# Altium PCB Alimentation 2V.PcbDoc
Units mil, origin at the board's own origin, x right, y up, seen from the top; angles counter-clockwise.
Board outline 2000 x 2000 mil, 4 copper layers (Top Layer, MidLayer1, MidLayer2, Bottom Layer); 20 components, 10 nets, 43 pads, 21 vias.
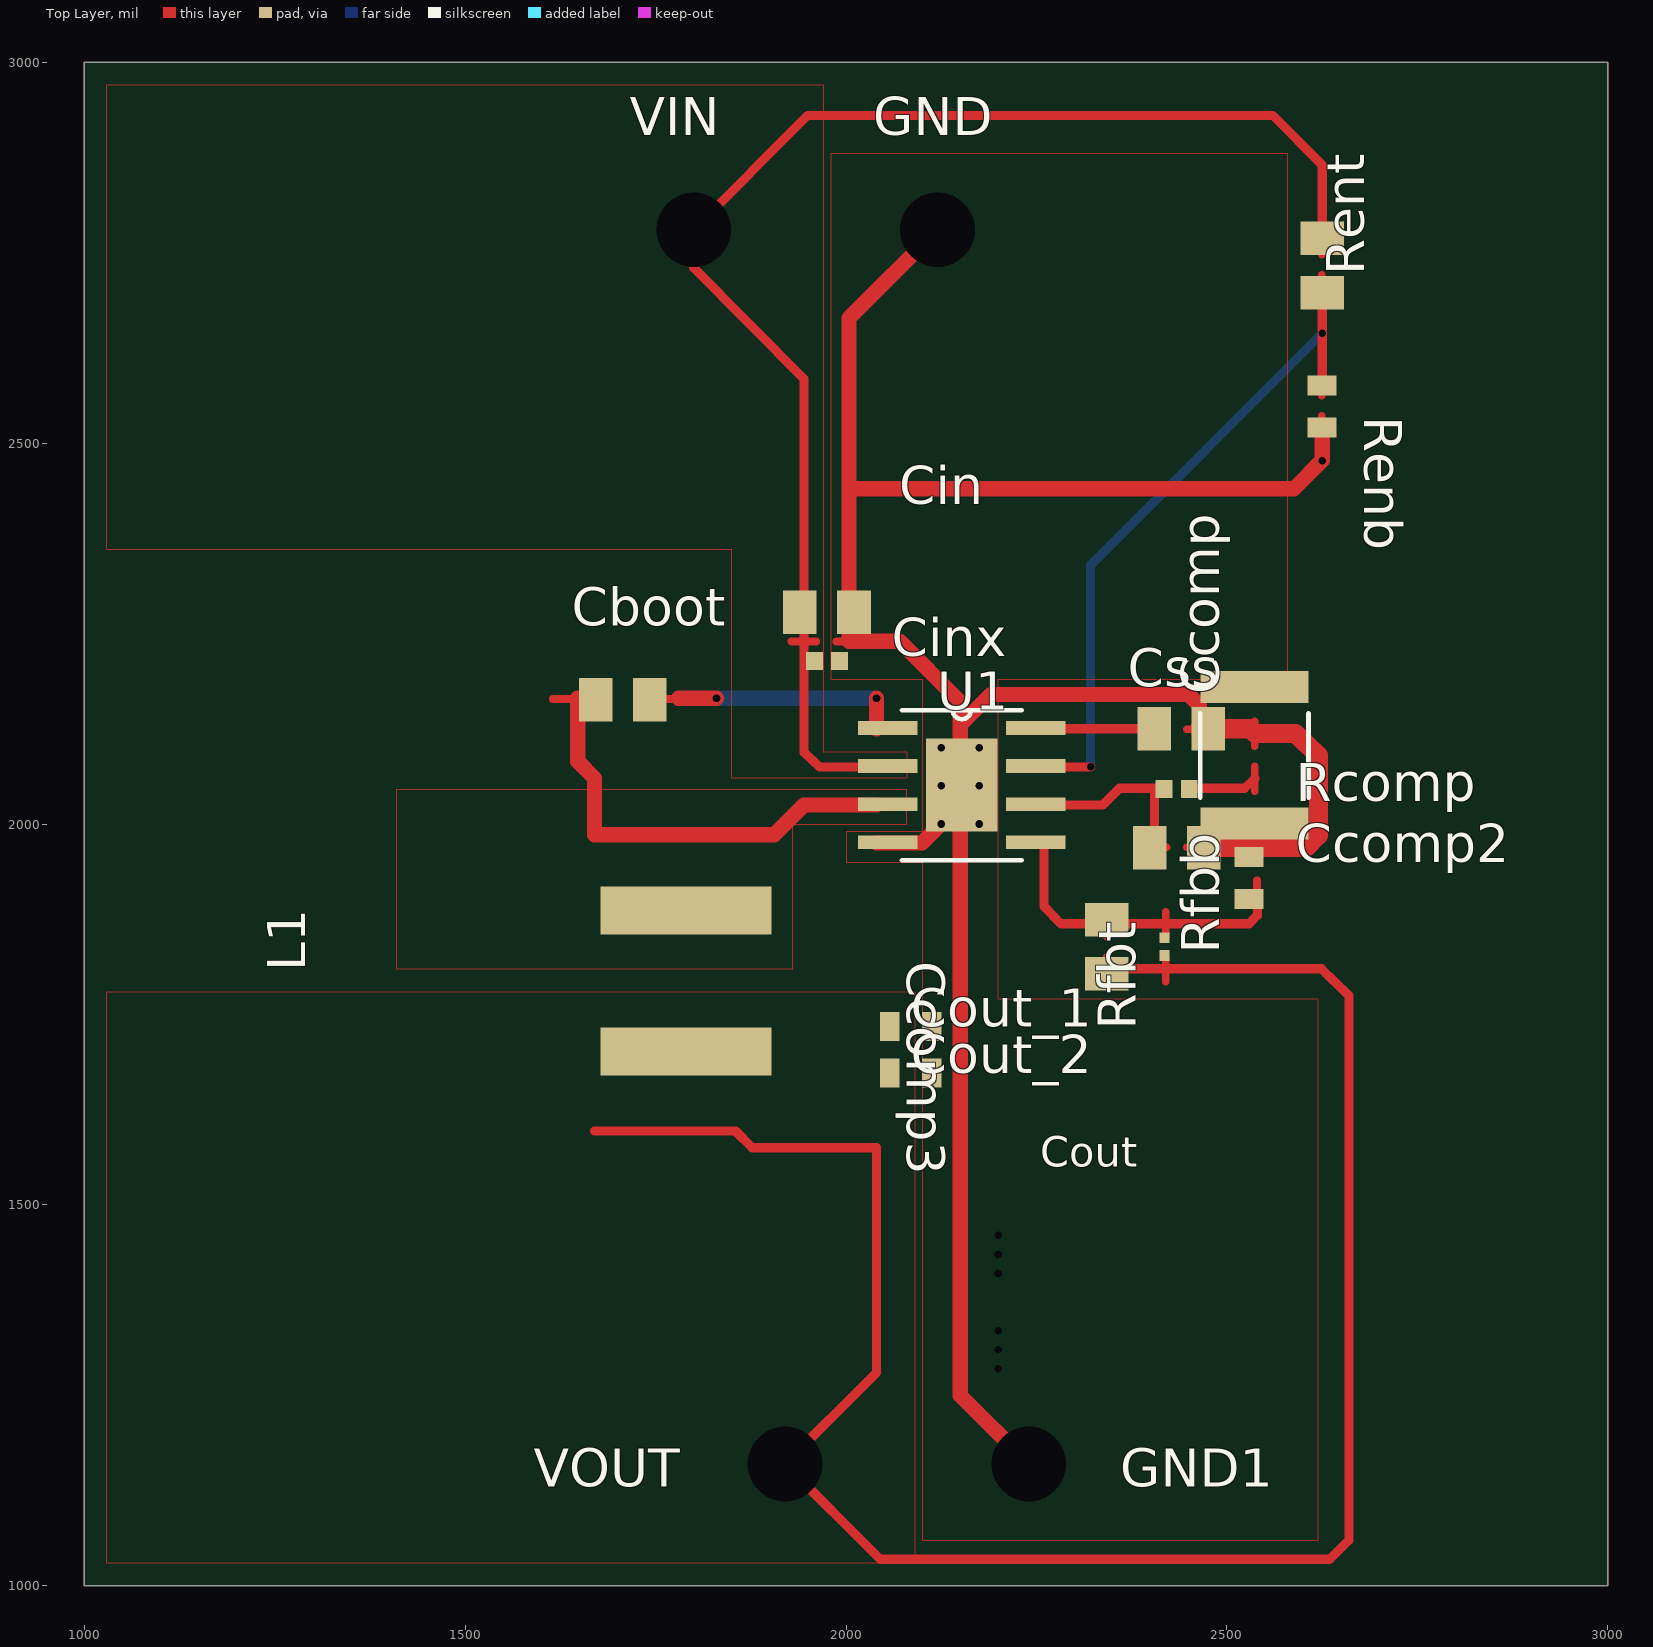
[diagram p0: Top Layer view]
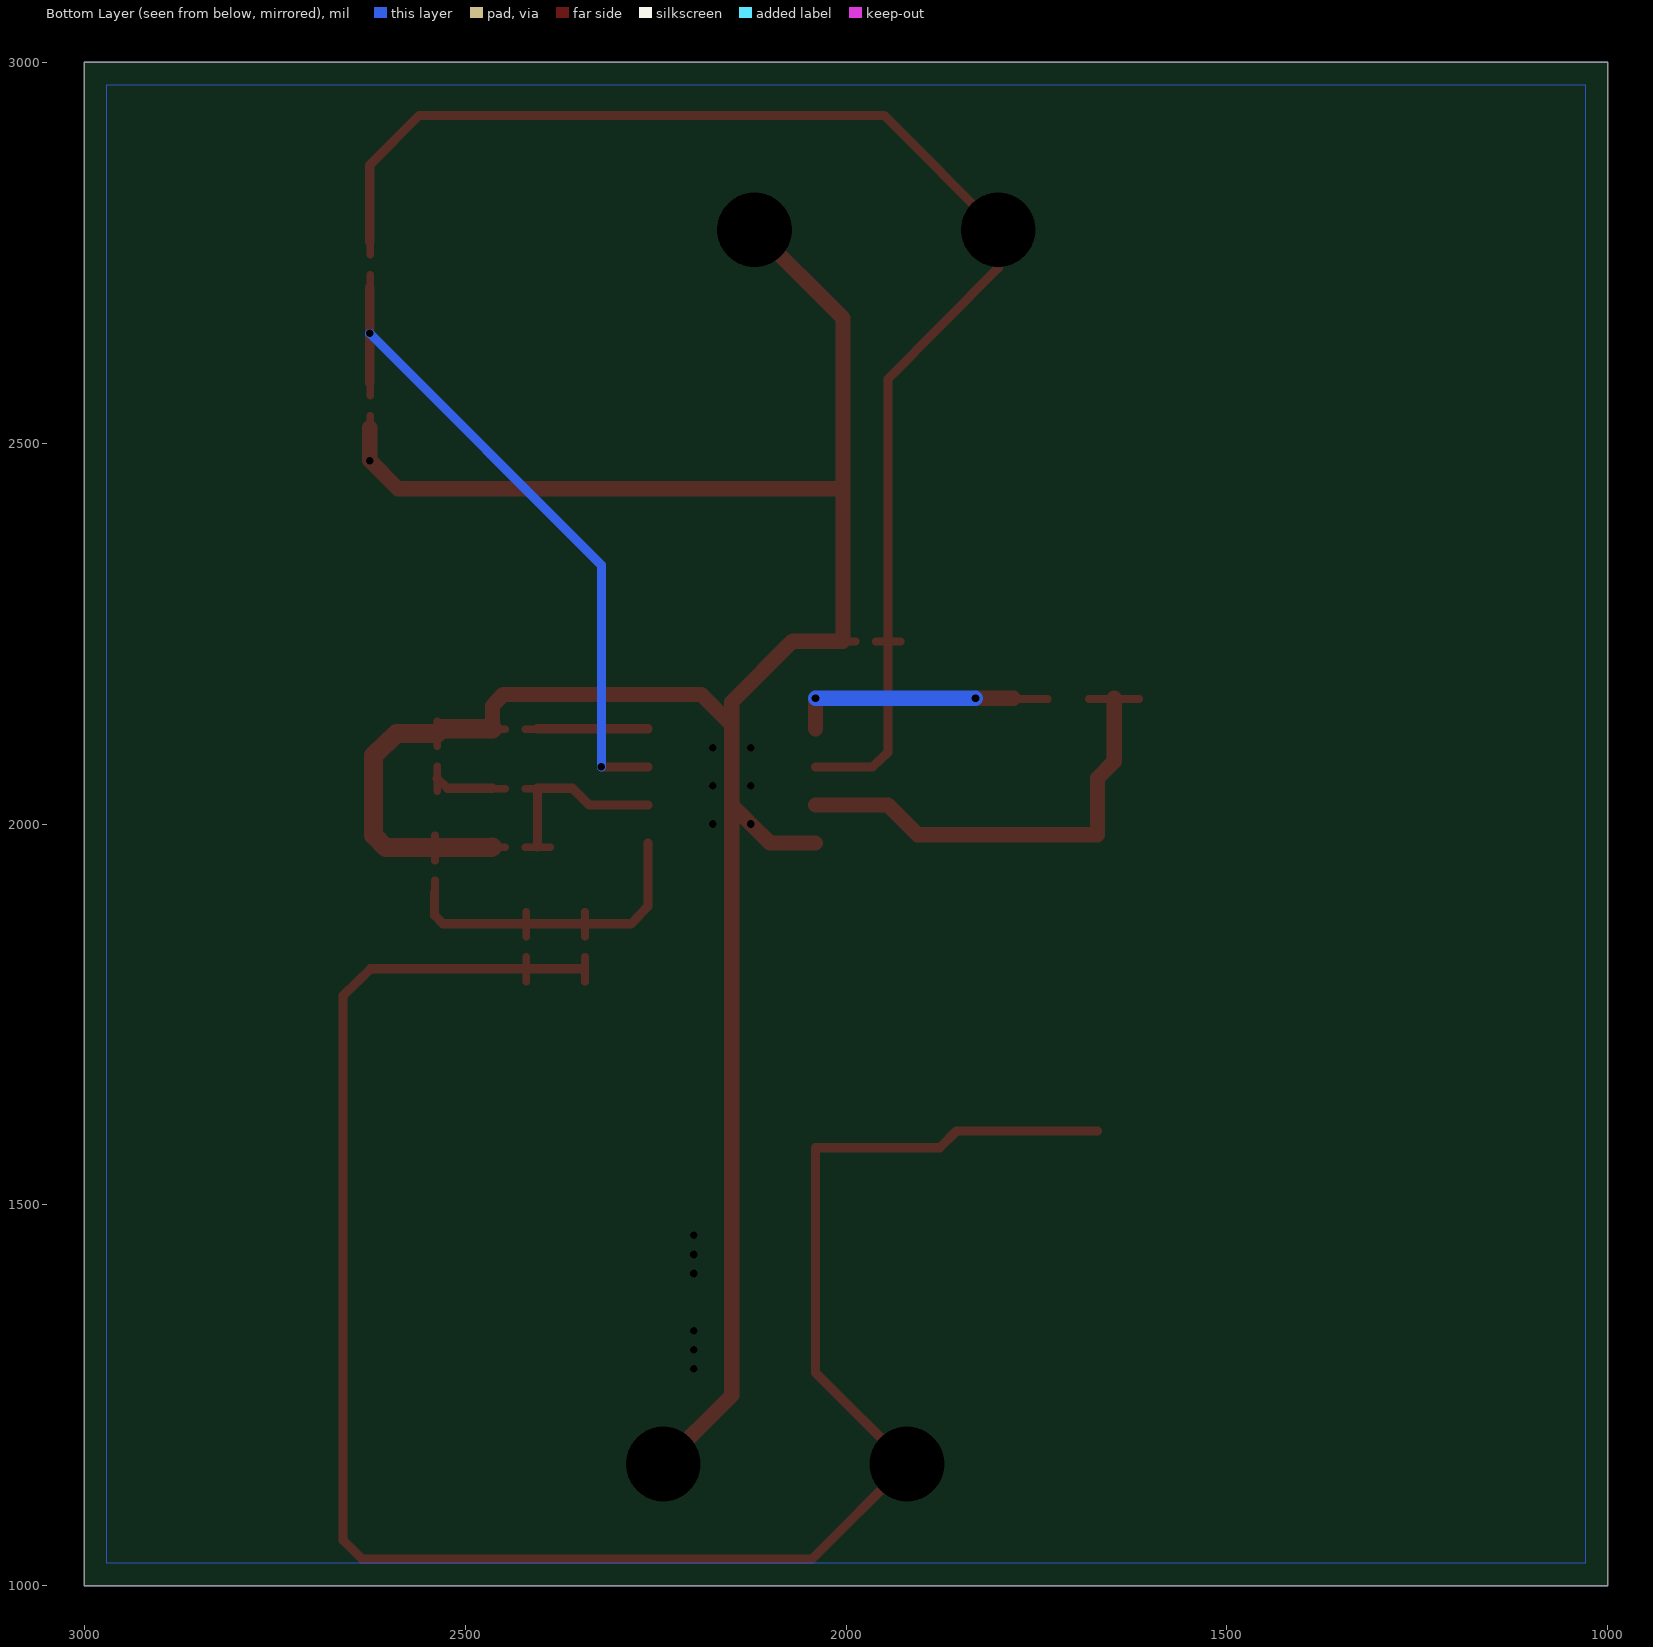
[diagram p1: Bottom Layer view, seen from below]

## Layer stack, top to bottom
Top Layer: signal copper 1.4
Dielectric: core 12.6, FR-4, Dk 4.8
MidLayer1: signal copper 1.4
Dielectric: prepreg 12.6, FR-4, Dk 4.8
MidLayer2: signal copper 1.4
Dielectric: core 12.6, FR-4, Dk 4.8
Bottom Layer: signal copper 1.4

## Board outline
1000,1000 3000,1000 3000,3000 1000,3000

## Design rules (kind name [scope] priority, off if disabled: settings)
PlaneConnect [All] p0: scope1count=1 scope1_0_kind=Board scope1_0_value=Board scope2count=1 scope2_0_kind=Board scope2_0_value=Board commentlength=0 planeconnectstyle=Direct reliefexpansion=20 reliefentries=4 reliefconductorwidth=10 reliefairgap=10
PlaneConnect [All] p1: planeconnectstyle=Direct reliefexpansion=20 reliefentries=4 reliefconductorwidth=10 reliefairgap=10
PolygonConnect [All] p0: scope1count=1 scope1_0_kind=Board scope1_0_value=Board scope2count=1 scope2_0_kind=Board scope2_0_value=Board commentlength=0 connectstyle=Direct reliefconductorwidth=10 reliefentries=4 polygonreliefangle="90 Angle"
PolygonConnect [All] p1: connectstyle=Direct reliefconductorwidth=10 reliefentries=4 polygonreliefangle="90 Angle"

## Components (designator, comment, footprint, x,y, rotation, side; value= is the part's Value field where it differs from the comment)
Cboot "" 0805 1707,2163 r0 top
Ccomp "" 1812 2536,2090 r90 top
Ccomp2 "" 0805 2434,1969 r0 top
Ccomp3 "" 0805 2342,1839 r270 top
Cin "" 0805 1975,2278 r0 top
Cinx "" 0402 1975,2214 r0 top
Cout_1 "" 0603 2085,1734 r0 top
Cout_2 "" 0603 2085,1673 r0 top
Css "" 0805 2440,2125 r0 top
GND "" TP-1502 2119,2779 r0 top
GND1 "" TP-1502 2239,1159 r0 top
L1 "" DG6045C 1790,1794 r90 top
Rcomp "" 0402 2434,2046 r0 top
Renb "" 0603 2625,2548 r270 top
Rent "" 0805 2625,2733 r90 top
Rfbb "" 0603 2529,1929 r90 top
Rfbt "" 0201 2418,1839 r90 top
U1 "" R-PDSO-G8 2152,2051 r0 top
VIN "" TP-1502 1798,2779 r0 top
VOUT "" TP-1502 1918,1159 r0 top

## Footprints (in the part's own frame and the unit in brackets; to place one, negate y for a bottom-side part, rotate by r counter-clockwise, add the part's x,y. Pads: shape width x height; smd on the part's side, far side on the other; paste and mask are expansions set on the pad)
0201 [mil]
  rect 14x13 smd: 1(-11.5,0) 2(11.5,0)
0402 [mil]
  rect 22x24 smd: 1(-16.5,0) 2(16.5,0)
0603 [mil]
  rect 26x38 smd: 1(-27.5,0) 2(27.5,0)
0805 [mil]
  rect 44x57 smd: 1(-35.5,0) 2(35.5,0)
1812 [mil]
  rect 42x142 smd: 1(-89.5,0) 2(89.5,0)
  silkscreen extent -55,-71 55,71
DG6045C [mm]
  rect 1.6x5.7 smd: 1(-2.35,0) 2(2.35,0)
R-PDSO-G8 [mil]
  rect 78x18.14 smd: 1(-97,75) 2(-97,25) 3(-97,-25) 4(-97,-75) 5(97,-75) 6(97,-25) 7(97,25) 8(97,75)
  rect 94x122 smd: 9(0,0)
  silkscreen extent -78,-98 78,98
TP-1502 [mil]
  round 65 / inner round 0 / far side round 65 hole 32: 1(0,0)

## Via types
v1: diameter 0, hole 10, Top Layer to Bottom Layer, 17 vias
v2: diameter 0, hole 98, Top Layer to Bottom Layer, 4 vias

## Nets (pads, with @x,y where several pads share a name; then routed paths per layer and width w, separated by ;. In a path a pad name is that pad's centre, name@x,y a point inside that pad or via, vN(x,y) a via of type N, cw(c..) or ccw(c..) an arc to the next point about the centre after c; other vN are vias at no path point)
0: Ccomp2.2 Ccomp.2 Cin.2 Cinx.2 Cout_1.2 Cout_2.2 Css.2 GND1.1 GND.1 Renb.2 Rfbb.2 U1.4 U1.9 | length 3617.8
  Top Layer w10: 1987,2239.5 2020,2239.5 ; 2447,1969.5 Ccomp2.2@2480,1969.5 ; 2447,2124.5 Css.2@2480,2124.5 ; 2536.5,2102 2536.5,2135 ; Rfbb.2@2539.5,1952 2539.5,1985 ; 2624.5,2503 2624.5,2536
  Top Layer w20: U1.4@2040,1975 2100,1975 v1(2125,2000) U1.9@2150,2025 ; v2(2120,2780) 2004,2664 2004,2440 ; v2(2240,1160) 2150,1250 2150,1575 U1.9@2150,2025 ; Css.2@2464,2125 2464,2155 2450,2170 2190,2170 2150,2130 ; Renb.2@2625,2520 v1(2625,2477) 2588,2440 2004,2440 ; 2004,2440 2004,2240 2070,2240 2150,2160 2150,2130 ; U1.9@2150,2025 2150,2050 2150,2130
  Top Layer w25: Ccomp2.2@2464,1970 2465,1969 2540,1969 2604,1969 2620,1985 2620,2090 2590,2119 2537,2119 2531,2125 Css.2@2464,2125
  other v1: 2200,1285 2200,1310 2200,1335 2200,1410 2200,1435 2200,1460 2175,2000 2125,2050 2175,2050 2125,2100 2175,2100
1: Renb.1 Rent.1 U1.7 | length 947.9
  Top Layer w10: 2624.5,2562 2624.5,2595 ; Rent.1@2624.5,2688 2624.5,2721
  Top Layer w12: U1.7@2260,2075 v1(2321,2075) ; Renb.1@2625,2579 Rent.1@2625,2705
  Bottom Layer w12: v1(2321,2075) 2321,2340 v1(2625,2644)
3: Ccomp.1 Rcomp.2 | length 144.1
  Top Layer w10: Rcomp.2@2447,2046.5 2480,2046.5 ; 2536.5,2043 2536.5,2076
  Top Layer w12: 2464,2047 2523,2047 2537,2060
4: Ccomp2.1 Rcomp.1 U1.6 | length 297.1
  Top Layer w10: Ccomp2.1@2388,1969.5 2421,1969.5 ; 2388,2046.5 Rcomp.1@2421,2046.5
  Top Layer w12: U1.6@2260,2025 2337,2025 2359,2047 2405,2047 Ccomp2.1@2405,1970
5: Ccomp3.1 Rfbb.1 Rfbt.2 U1.5 | length 506.4
  Top Layer w10: 2342.5,1852 Ccomp3.1@2342.5,1885 ; Rfbt.2@2419.5,1852 2419.5,1885 ; Rfbb.1@2539.5,1893 2539.5,1926
  Top Layer w12: U1.5@2260,1975 2260,1892 2282,1869 2343,1869 2420,1869 2529,1869 2540,1880 Rfbb.1@2540,1910
6: Cboot.1 L1.2 U1.3 | length 640.3
  Top Layer w10: 1615,2164 Cboot.1@1681,2164
  Top Layer w20: 1648,2165 1648,2082 1670,2060 1670,1986 1906,1986 1945,2025 U1.3@2040,2025
7: Cboot.2 U1.1 | length 366
  Top Layer w10: Cboot.2@1735,2164 1801,2164
  Top Layer w20: 1780,2165 v1(1830,2165) ; U1.1@2040,2125 v1(2040,2165)
  Bottom Layer w20: v1(1830,2165) v1(2040,2165)
8: Ccomp3.2 Cout_1.1 Cout_2.1 L1.1 Rfbt.1 VOUT.1 | length 2758.2
  Top Layer w10: Ccomp3.2@2342.5,1793 2342.5,1826 ; 2419.5,1793 Rfbt.1@2419.5,1826
  Top Layer w12: 1670,1597 1855,1597 1877,1575 2040,1575 2040,1280 v2(1920,1160) 2045,1035 2635,1035 2660,1060 2660,1775 2624,1810 2420,1810 Ccomp3.2@2343,1810
11: Cin.1 Cinx.1 Rent.2 U1.2 VIN.1 | length 1929.4
  Top Layer w10: 1928,2239.5 1961,2239.5 ; Rent.2@2624.5,2747 Rent.2@2624.5,2780
  Top Layer w12: U1.2@2040,2075 1965,2075 1945,2094 1945,2240 1945,2440 1945,2584 1800,2730 v2(1800,2780) 1950,2930 2560,2930 2625,2865 Rent.2@2625,2764
16: Css.1 U1.8 | length 178
  Top Layer w10: Css.1@2388,2124.5 Css.1@2421,2124.5
  Top Layer w12: U1.8@2260,2125 Css.1@2405,2125

## Polygon pours and split planes (outlines as drawn)
11 on Top Layer " " (solid, pour order 0): 1030,2970 1970,2970 1970,2095 2080,2095 2080,2060 1850,2060 1850,2360 1030,2360
6 on Top Layer " " (solid, pour order 1): 1410,1810 1930,1810 1930,2000 2080,2000 2080,2045 1410,2045
8 on Top Layer " " (solid, pour order 2): 2090,1780 2090,1030 1030,1030 1030,1780
0 on Top Layer " " (solid, pour order 3): 2100,1990 2000,1990 2000,1950 2100,1950 2100,1060 2620,1060 2620,1770 2200,1770 2200,2190 2580,2190 2580,2880 1980,2880 1980,2190 2100,2190
0 on Bottom Layer " " (solid, pour order 4): 2970,2970 1030,2970 1030,1030 2970,1030

## Other copper
Multi-Layer:
  the board outline again, w1

## Silkscreen, mask and mechanical layers (free items; w line width, h text height)
Top Overlay:
  text "Cout" at 2255,1550 h40